# EAGLE board Power_Supply (EAGLE 7.2.0)
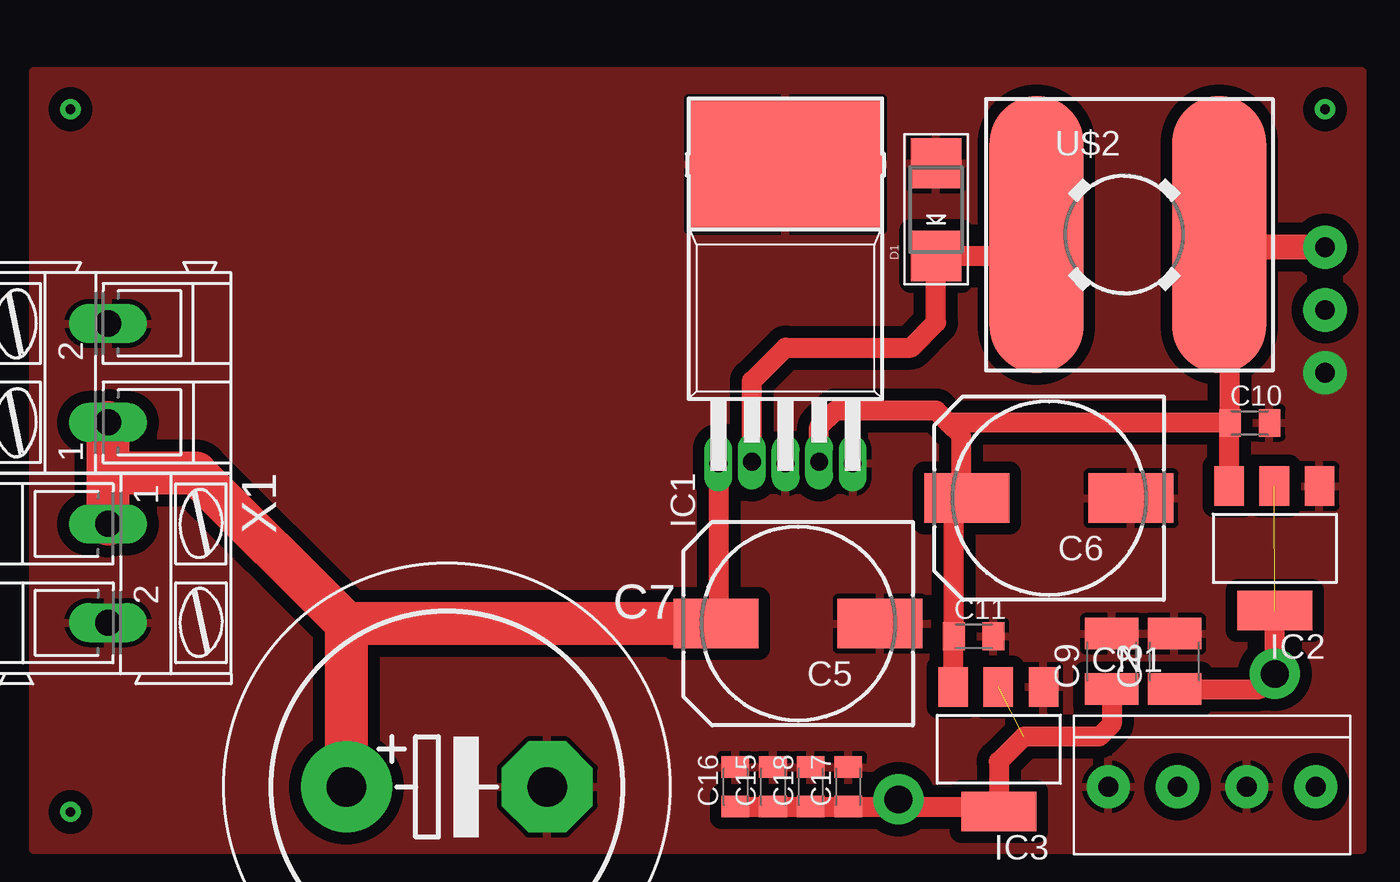
[diagram p0: board, top side]
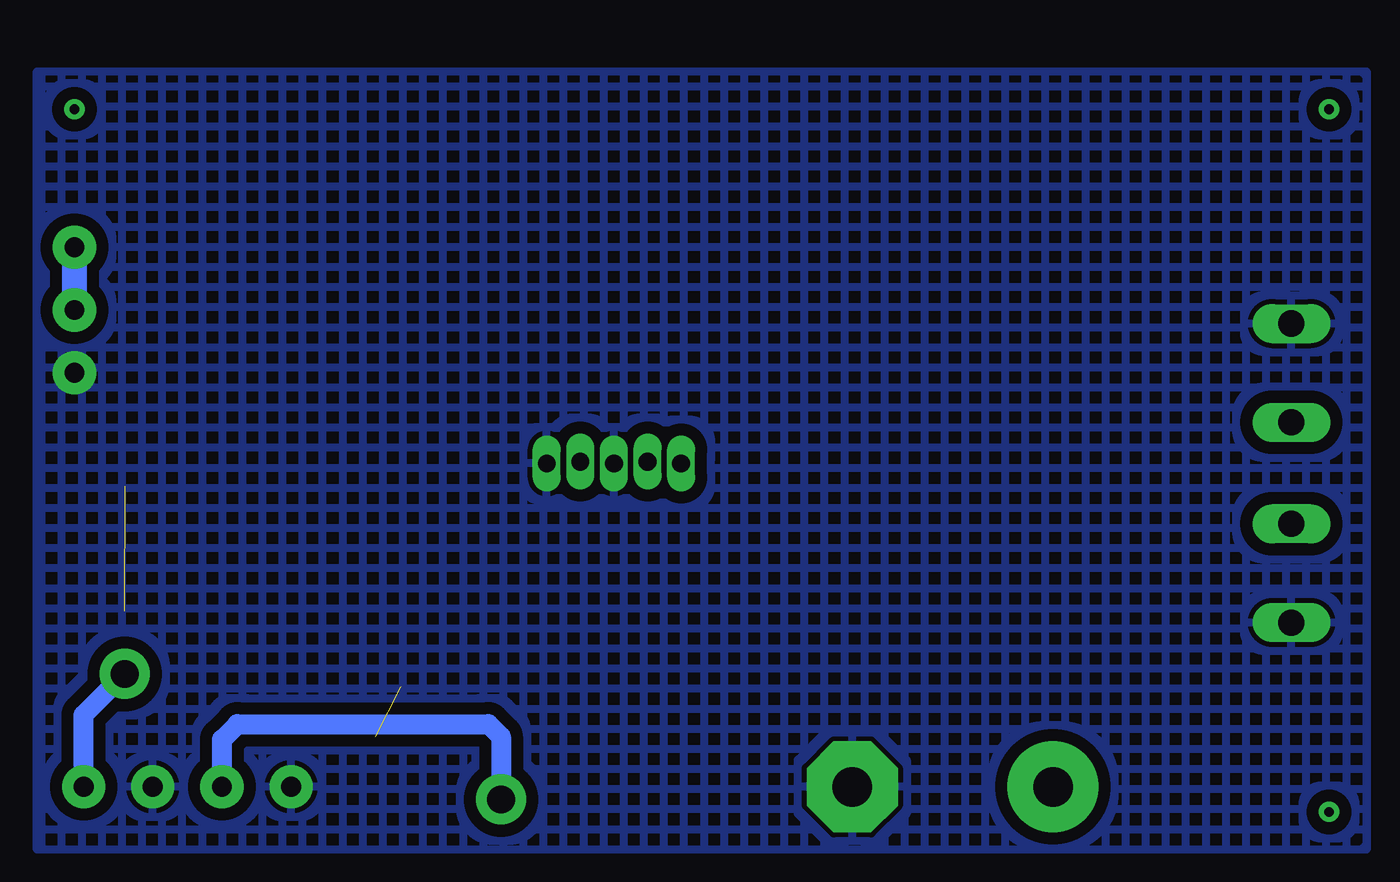
[diagram p1: board, bottom side, seen from below]

No outline drawn. Coordinates in mm, seen from the top.
Copper layers (1*16): Top 0.035mm / dielectric 1.5mm / Bottom 0.035mm
Design rules "default": minimum track width 10mil, minimum drill 24mil, track to track 8mil, track to pad 8mil, pad to pad 8mil, via to via 8mil, smd to smd 8mil, copper to edge 40mil, drill to drill 8mil, minimum pad ring 10mil, minimum via ring 8mil, stop-mask expansion 4mil, vias tented up to drill 0mil, thermal gap 10mil

## Footprints (pad centres in the part's own frame; a part is rotated, then mirrored left to right if it is on the bottom)
150CLZ-1014 = smd 4.3 x 2.5: + 4.15,0; - -4.15,0
EB22,5D = drill 2.007 pad 4.597: + -5.08,0 | drill 2.007 pad 4.597 octagon: - 5.08,0
C1210 = smd 1.6 x 2.7: 1 -1.4,0; 2 1.4,0
C0805K = smd 1.1 x 1.4: 1 -1,0; 2 1,0
1X04-3.5MM = drill 1 pad 2.184: 1 -5.25,0; 2 -1.75,0; 3 1.75,0; 4 5.25,0
SMADIODE = smd 2.54 x 2.54: A 2.349,0; C -2.349,0
TO220-5 = drill 0.9 long: 1 -3.4,-7.13; 2 -1.7,-7.04; 3 0,-7.13; 4 1.7,-7.04; 5 3.4,-7.13 | smd 9.8 x 6.6: 6 0,8
SOT223 = smd 1.499 x 2.007: 1 -2.261,-3.15; 2 0.025,-3.15; 3 2.311,-3.15 | smd 3.81 x 2.007: 4 0,3.15
INDUCTOR = smd 4.75 x 14: 1 0,0; 2 9.25,0
AK300/2 = drill 1.321 long: 1 -2.515,0; 2 2.489,0

## Placement (x,y rotation side)
C5  100u 63v  [150CLZ-1014]  38.73,11.43 180 top
C6  1000u 25v  [150CLZ-1014]  51.44,17.78 180 top
C7  [EB22,5D]  20.95,3.17 0 top
C8  10u  [C1210]  57.78,9.53 90 top
C9  10u  [C1210]  54.61,9.53 90 top
C10  0.1u  [C0805K]  61.59,21.59 0 top
C11  0.1u  [C0805K]  47.62,10.79 0 top
C15  [C0805K]  37.47,3.17 90 top
C16  [C0805K]  35.56,3.17 90 top
C17  [C0805K]  41.27,3.17 90 top
C18  [C0805K]  39.37,3.17 90 top
CN1  1X4-3.5MM  [1X04-3.5MM]  59.69,3.17 180 top
D1  RB050L  [SMADIODE]  45.72,32.38 90 top
IC1  [TO220-5]  38.1,26.67 0 top
IC2  REG1117  [SOT223]  62.87,15.24 180 top
IC3  REG1117  [SOT223]  48.9,5.08 180 top
U$2  INDUCTOR  [INDUCTOR]  50.8,31.11 0 top
X1  [AK300/2]  3.81,13.97 270 top
X2  [AK300/2]  3.81,24.13 90 top

## Library data of the parts
C5-C11 C15-C18 CN1 D1 = adafruit
IC1 U$2 = wooddy
IC2 IC3 = burr-brown; MPN: REG1117; OC_FARNELL: 1097566; OC_NEWARK: 14P6981
X1 X2 = con-ptr500; OC_FARNELL: unknown; OC_NEWARK: unknown

## Nets
3.3V: C9.1 C15.1 C16.1 C17.1 C18.1 CN1.3 IC3.2
5V: C8.1 CN1.1 IC2.2
12V: C6.+ C10.1 C11.1 IC1.4 IC2.3 IC3.3 U$2.2
GND: C5.- C6.- C7.- C8.2 C9.2 C10.2 C11.2 C15.2 C16.2 C17.2 C18.2 CN1.2 CN1.4 D1.A IC1.3 IC1.5 IC1.6 IC2.1 IC3.1 X1.2 X2.2
N$14: D1.C IC1.2 U$2.1
VCC: C5.+ C7.+ IC1.1 X1.1 X2.1

## Tracks (layer width: path | path; a pad name or v marks a point on that pad's centre or on a via)
3.3V  (via drill 1.4 pad 2.54)  (1 unrouted)
  Top 1.016: C16.1 C15.1 C18.1 C17.1 43.81,2.17 | 43.81,2.17 48.62,2.17 | 48.62,2.17 48.9,1.91 | v43.81,2.54 43.81,2.17 | C9.1 54.61,6.35 53.98,5.71 50.16,5.71 48.9,4.45 48.9,2.44 48.62,2.17
  Bottom 1.016: CN1.3 57.94,5.56 57.15,6.35 44.45,6.35 43.81,5.71 v43.81,2.54
5V  (via drill 1.4 pad 2.54)  (1 unrouted)
  Top 1.016: C8.1 62.1,8.12 v62.87,8.89 62.87,12.06
  Bottom 1.016: CN1.1 64.94,6.82 v62.87,8.89
12V  (via drill 1 pad 2.18)
  Top 1.016: U$2.2 60.96,30.84 60.96,29.21 60.59,28.84 C10.1 60.55,21.55 | IC2.3 60.55,21.55 | 60.55,21.55 60.55,21.59 46.35,21.59 | IC1.4 39.8,21.39 40.64,22.23 45.72,22.23 46.35,21.59 | 46.35,21.59 46.99,20.95 46.99,18.41 | 46.99,18.41 46.99,18.07 C6.+ | C6.+ 46.62,17.75 C11.1 46.58,10.75 IC3.3 | C6.+ 47.28,18.12 46.99,18.41
  Top 1.27: v65.41,30.48 60.05,30.48 | 59.69,30.48 60.05,30.48 | 60.05,30.48 U$2.2
  Bottom 1.27: v65.41,27.3 v65.41,30.48
GND  (via drill 1 pad 2.18)
  other vias: 65.41,24.13
  pour Top (isolate 0.6): 0,0 67.31,0 67.31,39.37 0,39.37
  pour Bottom (isolate 0.61, hatched): 0,0 67.31,0 67.31,39.37 0,39.37
N$2  (via drill 0.5 pad 1.02)
  other vias: 1.91,37.47
N$3  (via drill 0.5 pad 1.02)
  other vias: 1.91,1.91
N$4  (via drill 0.5 pad 1.02)
  other vias: 65.41,37.47
N$14
  Top 1.016: IC1.2 36.4,23.7 38.1,25.4 44.45,25.4 45.72,26.67 D1.C 50.35,30.04 U$2.1
VCC
  Top 1.016: IC1.1 34.7,11.54 C5.+
  Top 2.184: X1.1 3.81,19.05 | 3.81,19.05 X2.1 | C7.+ 15.88,11.43 | 15.88,11.43 8.26,19.05 3.81,19.05 | C5.+ 15.88,11.43